# Altium PCB LED_PCB.PcbDoc (part 3 of 3)
Units mil, origin at the board's own origin, x right, y up, seen from the top; angles counter-clockwise.
Board outline 8000 x 4000 mil, 2 copper layers (Top Layer, Bottom Layer); 186 components, 303 nets, 1412 pads, 346 vias.
Unrouted connection lines stored in the file: 5.
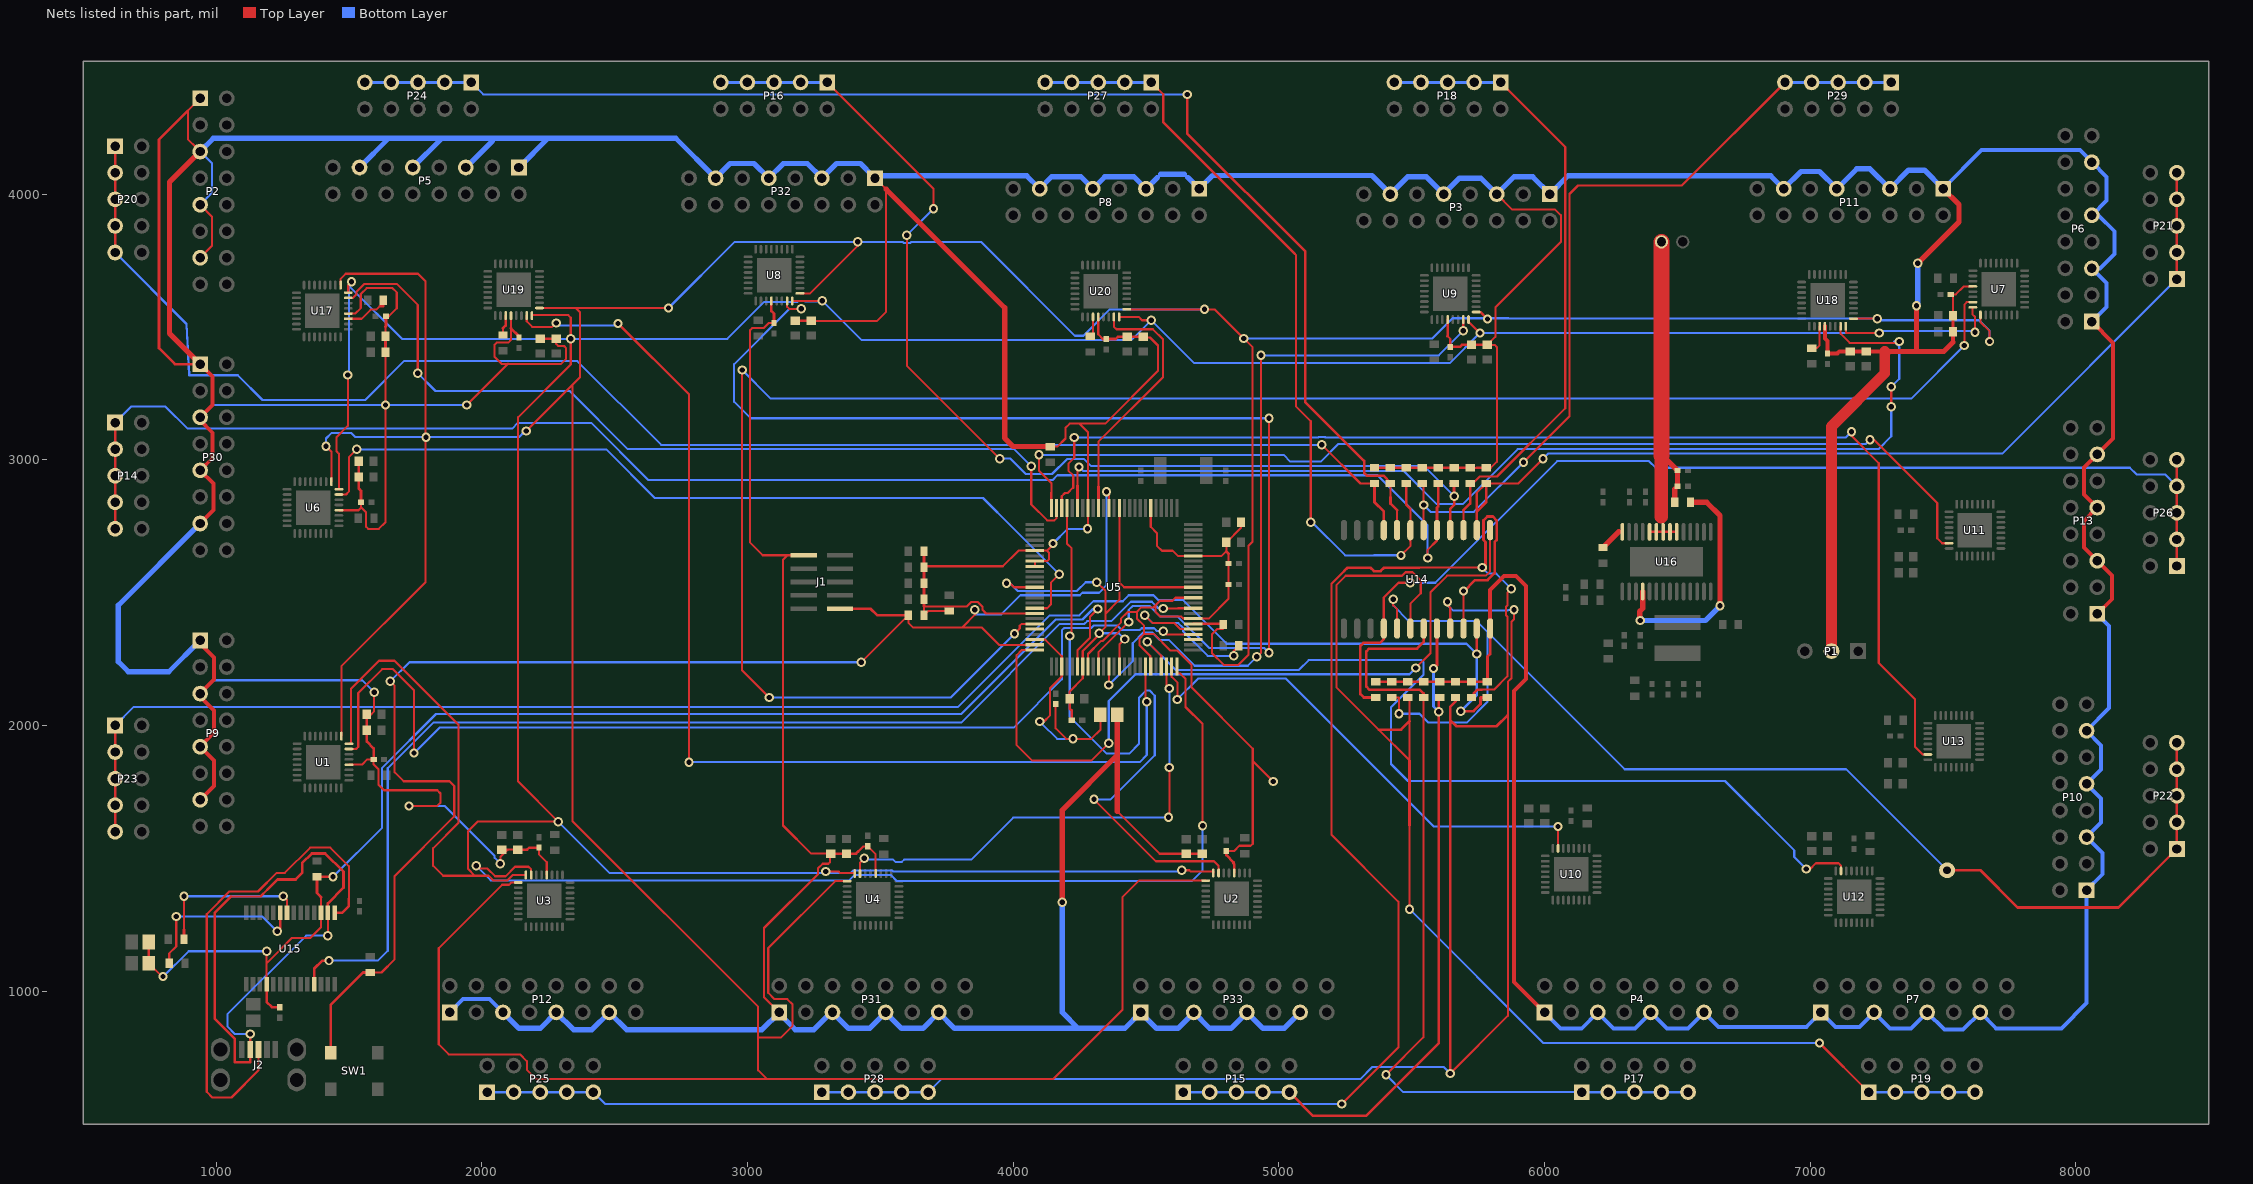
[diagram p3: the nets of this part, all layers, seen from the top]

## Via types
v1: diameter 35, hole 20, Top Layer to Bottom Layer, 334 vias
v2: diameter 25.98, hole 12.99, Top Layer to Bottom Layer, tented top, 12 vias

## Nets (pads, with @x,y where several pads share a name; then routed paths per layer and width w, separated by ;. In a path a pad name is that pad's centre, name@x,y a point inside that pad or via, vN(x,y) a via of type N, cw(c..) or ccw(c..) an arc to the next point about the centre after c; other vN are vias at no path point) (continued)
NetR38_1: R38.1 U15.23 | length 673.5
  Top Layer w8: R38.1@823.98,1105 823.98,1142 850,1168.02 850,1272 v1(850,1281) ; v1(1230,1225) 1241.61,1236.61 U15.23@1241.61,1294.45
  Top Layer w10: v1@841,1281 v1@850,1272
  Bottom Layer w8: v1(850,1281) 1174,1281 v1@1227.52,1227.48
NetR39_1: R39.1 U15.22 | length 639.4
  Top Layer w8: R39.1@879.53,1195 879.53,1230.53 v1(879.53,1357) ; v1(1253,1357) 1267.2,1342.8 U15.22@1267.2,1294.45
  Top Layer w10: R39.1@879.53,1195 879.53,1230.53
  Bottom Layer w8: v1(879.53,1357) v1(1253,1357)
NetR41_2: R41.2 U16.4 | length 932.5
  Top Layer w8: v1(6360,2395) 6355,2400 6360,2400 v1@6360,2405
  Top Layer w20: v1@6359.29,2409.29 6358,2410.57 6358,2428.8 6369.57,2440.36 U16.4@6369.57,2504.17 ; R41.2@6549.53,2840 6610,2840 6660,2790 v1(6660,2450)
  Bottom Layer w20: v1(6360,2395) 6355,2400 6360,2400 6360,2405 6370,2395 6605,2395 v1(6660,2450)
NetR42_1: R42.1 U16.28 | length 97.3
  Top Layer w8: 6279.05,2728.58 U16.28@6292.8,2728.58
  Top Layer w20: R42.1@6220,2669.53 6279.05,2728.58
NetR48_2: R48.2 U18.27 | length 106.3
  Top Layer w8: R48.2@7005,3420 7024,3420 7035.47,3431.47 U18.27@7035.47,3502.56
NetR49_2: R49.2 U17.27 | length 173.9
  Top Layer w8: U17.27@1497.44,3530.47 1547.94,3530.47 1582.47,3565 1603.43,3565 1616.28,3577.84 1629.53,3577.84 R49.2@1629.53,3600
NetR50_2: R50.2 U19.27 | length 129.1
  Top Layer w8: R50.2@2080,3469.53 2080,3495 2090.16,3505.16 2090.47,3505.47 U19.27@2090.47,3542.56
  Top Layer w10: 2080,3495 2090.16,3505.16 U19.27@2090.16,3542.56
NetR51_2: R51.2 U20.27 | length 77.4
  Top Layer w8: R51.2@4290,3464.53 4300.47,3475 U20.27@4300.47,3537.56
RESET: D3.1 J1.10 R9.1 SW1.1 U5.64 U5.99 | length 5752.2
  Top Layer w8: D3.1@1580,1070.47 1622.47,1070.47 1672,1120 1672,1433.5 1896.5,1658 1896.5,1772.14 1878.5,1790.14 1705.86,1790.14 1672,1824 1672,2150 v1(1656,2166) ; J1.10@3348.11,2439.21 3464,2439.21 ; v1(3428.47,2238) R9.1@3605.47,2415 3605.47,2386.56 3622.75,2369.28 3809.28,2369.28 ; v1(3855,2435) 3855,2421 3858,2418 3809.28,2369.28 ; U5.99@4081.77,2303.46 3946.54,2303.46 3880.72,2369.28 3809.28,2369.28 ; v1(4351,2880) 4360.32,2870.68 U5.64@4360.32,2818.23
  Top Layer w10: SW1.1@1431.42,768.9 1431.42,948.42 1553.47,1070.47 D3.1@1580,1070.47 ; 3464,2439.21 3488.21,2415 R9.1@3605.47,2415
  Bottom Layer w8: v1(1656,2166) 1728,2238 v1(3428.47,2238) ; v1(3855,2435) 3855,2421 3858,2418 3955.36,2418 4027.26,2489.91 4250.91,2489.91 4260.5,2499.5 4323.5,2499.5 4351,2527 v1(4351,2880)
SEL_LED_0: U1.31 U5.29 | length 4016.8
  Top Layer w8: U1.31@1500.2,1911.46 1526.46,1911.46 1535,1920 1535,2122 1625,2212 1666,2212 1745,2133 v1(1745,1896) ; v1(4565,2355) 4577.17,2342.83 U5.29@4678.23,2342.83
  Bottom Layer w8: v1(1745,1896) 1841,1992 4002,1992 4183.5,2173.5 4183.5,2358 4192,2366.5 4294.5,2366.5 4304.5,2376.5 4391.13,2376.5 4407.82,2359.81 4477.18,2359.81 4483.37,2366 4530.41,2366 4541.41,2355 v1(4565,2355)
SEL_LED_1: U3.31 U5.25 | length 3869.5
  Top Layer w8: v1(1979,1472) 1990,1461 2021.82,1461 2050.32,1432.5 2089.68,1432.5 2125.18,1468 2176,1468 2185.79,1458.21 U3.31@2185.79,1437.44 ; U5.25@4616.22,2221.77 4616.22,2195.03 4629.55,2195.03 4648.58,2176 4648.58,2069.64 4713,2005.22 v1(4713,1623)
  Bottom Layer w8: v1(1979,1472) 2034,1417 3382.92,1417 3403.67,1437.74 3538.85,1437.74 3562.59,1414 4672,1414 4713,1455 v1(4713,1623)
SEL_LED_2: U4.31 U5.23 | length 1856.6
  Top Layer w8: U4.31@3423.54,1442.44 3423.54,1483.54 v1(3440,1500) ; U5.23@4576.85,2221.77 4576.85,2150 v1(4588,2138.85) ; v1(4585,1655) 4575,1655 4588,1668 v1(4588,1842)
  Bottom Layer w8: v1@3440,1495 3548.31,1495 3556.78,1486.53 3581.22,1486.53 3589.69,1495 3842,1495 4000,1653 v1@4573,1653 ; v1(4588,1842) v1(4588,2138.85)
SEL_LED_3: U2.31 U5.72 | length 2503.3
  Top Layer w8: U5.72@4202.83,2818.23 4202.83,2684.17 4220,2667 4220,2344 v1(4213,2337) ; v1(4304,1722) 4537,1489 4756.03,1489 4773.03,1472 U2.31@4773.03,1444.68
  Bottom Layer w8: v1(4213,2337) 4213,2033 4352,1894 4437,1894 4473.5,1930.5 4473.5,2104.5 4501,2132 4513,2132 4533,2112 4533,1888 4367,1722 v1(4304,1722)
SEL_LED_4: U5.74 U17.31 | length 3338.6
  Top Layer w8: U17.31@1497.44,3609.21 1515.21,3609.21 1528.69,3622.69 1528.69,3632 1558.69,3662 1680,3662 1759,3583 v1(1759,3326) ; v1(4068,2976) 4068,2831.78 4128,2771.78 4155,2771.78 4163.46,2780.24 U5.74@4163.46,2818.23
  Bottom Layer w8: v1(1759,3326) 1826,3259 2330.74,3259 2549.74,3040 4004,3040 v1(4068,2976)
SEL_LED_5: U5.19 U19.31 | length 4218
  Top Layer w8: U19.31@2169.21,3542.56 2169.21,3520.79 2190,3500 2265,3500 v1(2280,3515) ; v1(2513,3513) 2780,3246 v1(2780,1862) ; U5.19@4498.11,2221.77 4498.11,2093.89 v1(4503,2089)
  Bottom Layer w8: v1(2280,3515) 2289.5,3505.5 2505.5,3505.5 v1(2513,3513) ; v1(2780,1862) 4476,1862 4503,1889 v1(4503,2089)
SEL_LED_6: U5.66 U20.31 | length 1057.9
  Top Layer w8: U5.66@4320.94,2818.23 4320.94,3067.94 4564.5,3311.5 4564.5,3452.5 4526,3491 4389.21,3491 4379.21,3501 U20.31@4379.21,3537.56
  Top Layer w10: U5.66@4320.94,2818.23 4320.94,2899.06
SEL_LED_7: U5.70 U18.31 | length 4123.5
  Top Layer w8: U5.70@4242.2,2818.23 4242.2,2967.2 v1(4248,2973) ; U18.31@7114.21,3502.56 7114.21,3474 7148.21,3440 v1@7335,3440 ; v1(7305,3200) v1(7305,3275)
  Top Layer w10: U5.70@4242.2,2818.23 4242.2,2902.8
  Bottom Layer w8: v1(4248,2973) 4263.5,2957.5 5469.5,2957.5 5594,2833 5692,2833 5899,3040 7257,3040 7305,3088 v1(7305,3200) ; v1(7305,3275) 7335,3305 7335,3425 7315,3445 v1(7335,3445)
SEL_LED_8: U5.92 U6.31 | length 3245.5
  Top Layer w8: U6.31@1462.44,2869.21 1484.21,2869.21 1489.21,2869.21 1500,2880 1500,2885 1500,3010 v1(1529,3039) ; U5.92@4081.77,2441.26 4128,2441.26 4142,2455.26 4142,2536.59 v1(4174,2568.59)
  Bottom Layer w8: v1(1529,3039) 2468,3039 2651,2856 3886.59,2856 3998.8,2743.8 v1(4174,2568.59)
SEL_LED_9: U5.10 U8.31 | length 4347.9
  Top Layer w8: U8.31@3149.21,3597.56 3149.21,3576 3157.21,3568 v1(3203,3568) ; U5.10@4320.94,2221.77 4320.94,2275.94 4414.31,2369.31 v1(4435,2389.31) ; v1(4963,2274) v1(4963,3156)
  Bottom Layer w8: v1(3203,3568) 3158,3568 2950,3360 2950,3218 3012,3156 v1(4963,3156) ; v1(4435,2389.31) 4435,2435 4449.5,2449.5 4513.78,2449.5 4553.78,2409.5 4620,2409.5 4738,2291.5 4945.5,2291.5 v1(4963,2274)
SEL_LED_10: U5.12 U9.31 | length 2797.2
  Top Layer w8: v1(4360.32,2152.32) U5.12@4360.32,2221.77 ; v1(4917,2258) 4933,2274 v1(4933,3393) ; v1(5694.21,3485) U9.31@5694.21,3527.56
  Bottom Layer w8: v1(4360.32,2152.32) 4450,2242 4450,2310 4490,2350 4523.78,2350 4552.78,2321 4587,2321 4683.5,2224.5 4883.5,2224.5 v1(4917,2258) ; v1(4933,3393) 5602.21,3393 v1(5694.21,3485)
SEL_LED_11: U5.95 U7.31 | length 7313.2
  Top Layer w8: v1(2980,3338) 2980,2207 v1(3082,2105) ; v1(4005,2345) 4025,2365 4025,2375 4032.2,2382.2 U5.95@4081.77,2382.2 ; v1(7580,3430) 7580,3584 7589.23,3593.23 U7.31@7612.09,3593.23
  Bottom Layer w8: v1(2980,3338) 3088,3230 7380,3230 v1(7580,3430) ; v1(3082,2105) 3765,2105 v1(4005,2345)
SEL_LED_12: U5.24 U10.31 | length 1911
  Top Layer w8: U5.24@4596.54,2221.77 4596.54,2183.46 4618,2162 v1(4618,2098) ; U10.31@6050.79,1537.44 v1(6050.79,1620)
  Bottom Layer w8: v1(4618,2098) 4696.5,2176.5 5025.5,2176.5 5582,1620 v1(6050.79,1620)
SEL_LED_13: U5.22 U12.31 | length 3540.3
  Top Layer w8: v1(4505,2315) 4557.17,2262.83 U5.22@4557.17,2221.77 ; v1@7000,1460 7021.17,1481.17 7106.62,1481.17 7115.79,1472 U12.31@7115.79,1452.44
  Bottom Layer w8: v1(4505,2315) 4611.5,2208.5 5074.5,2208.5 5112,2246 5536,2246 5545,2237 5545,2192 5422,2069 5422,1855 5486,1791 6679,1791 6940,1530 6940,1505 v1(6985,1460)
SEL_LED_14: U5.73 U13.31 | length 4581.5
  Top Layer w8: U5.73@4183.15,2818.23 4183.15,2863.15 4195,2875 4205,2875 4224,2894 4225.2,2894 ; 4226,2894 4226,2941 4208,2959 4208,2985 4230,3007 v1(4230,3084) ; v1@7147.5,3097.5 7258,2987 7258,2235 7394,2099 7394,1920 7423.21,1890.79 U13.31@7442.56,1890.79
  Bottom Layer w8: v1(4230,3084) 5148.28,3084 5149.78,3085.5 5174.22,3085.5 5175.72,3084 7134,3084 v1(7155,3105)
SEL_LED_15: U5.75 U11.31 | length 3986.1
  Top Layer w8: v1(4097.5,3018.5) 4097.5,2958.5 4143.78,2912.22 U5.75@4143.78,2818.23 ; v1(7225,3075) 7240,3075 7478,2837 7478,2704 7496.21,2685.79 U11.31@7522.56,2685.79
  Top Layer w10: U5.75@4143.78,2818.23 4143.78,2876.22
  Bottom Layer w8: v1(4097.5,3018.5) 5017.85,3018.5 5043.26,2993.08 5158.08,2993.08 5224,3059 7209,3059 v1(7225,3075)
SEL_LED_MODE: U5.96
SPI_CLK: U1.32 U2.32 U3.32 U4.32 U6.32 U7.32 U8.32 U9.32 U17.32 U18.32 U19.32 U20.32 | length 14995.8
  Top Layer w8: U6.32@1462.44,2888.9 1462.44,3022.56 1453.5,3031.5 1453.5,3085.19 1496,3127.69 v1(1496,3319) ; 1497.44,3657.44 U17.32@1497.44,3628.9 U17.32@1500,3628.9 ; U1.32@1500.2,1931.14 1508,1931.14 1508,2138 1613.5,2243.5 1671.5,2243.5 1912.5,2002.5 1912.5,1633.5 1817,1538 1817,1472 1854.5,1434.5 1973.98,1434.5 ; 2114.3,1434.5 2096.3,1416.5 ; U3.32@2166.1,1437.44 2117.24,1437.44 2096.3,1416.5 ; U19.32@2188.9,3547 U19.32@2188.9,3542.56 2190.84,3544.5 2325.5,3544.5 2335,3535 v1(2335,3455) 2335,3358.28 2137,3160.28 2137,1789 v1(2288,1638) 1984,1638 1948.54,1602.54 1948.54,1459.94 1973.98,1434.5 ; U8.32@3168.9,3597.56 3168.9,3598 v1(3282,3598) ; v1(3295,1450) 3344,1450 3350,1444 3403.86,1444 U4.32@3403.86,1442.44 ; U20.32@4398.9,3537.56 4472.44,3537.56 4485,3525 v1(4520,3525) ; v1(4635,1455) 4663,1455 4667,1451 4753.35,1451 U2.32@4753.35,1444.68 ; U9.32@5713.9,3527.56 5713.9,3519.83 v1(5756.72,3477) ; U18.32@7133.9,3502.56 7133.9,3477 v1(7260,3477) ; U7.32@7612.09,3573.54 7610,3573.54 7610,3548 7620,3538 v1(7620,3480) ; 1973.98,1434.5 2025.7,1434.5 2043.7,1416.5 2096.3,1416.5
  Bottom Layer w8: v1@1500,3323 1500,3655 1700,3455 v1(2335,3455) 2924,3455 3063,3594 3187.28,3594 3190.78,3597.5 3215.22,3597.5 3217.67,3595.05 3279.05,3595.05 v1(3282,3598) 3430,3450 4445,3450 v1(4520,3525) 4681.5,3363.5 5643.22,3363.5 v1(5756.72,3477) v1(7260,3477) 7268,3485 7567,3485 7615,3485 v1(7620,3480) ; v1(2288,1638) 2482,1444 3387.29,1444 3397.04,1453.74 3545.47,1453.74 3548.22,1451 v1@4635,1451 ; v1(4635,1455) v1@4639,1451
  other v1: 1510,3670
SPI_MISO: R10.2 U5.30 | length 656.7
  Top Layer w8: v1(4495,2415) 4525,2385 4607.52,2385 4630,2362.52 U5.30@4678.23,2362.52 ; v1(4830,2262) 4830,2280.47 R10.2@4849.53,2300
  Bottom Layer w8: v1(4495,2415) 4525,2385 4621.72,2385 4639.5,2367.22 4639.5,2354.81 4732.31,2262 v1(4830,2262)
SPI_MOSI: R11.2 U1.1 U2.1 U3.1 U4.1 U5.31 U6.1 U7.1 U8.1 U9.1 U17.1 U18.1 U19.1 U20.1 | length 20190.7
  Top Layer w8: v1(1414,3051) 1433.9,3031.1 U6.1@1433.9,2917.44 ; U17.1@1468.9,3657.44 1468.9,3680.9 1488,3700 1760,3700 1789,3671 1789,2540 1471.65,2222.65 U1.1@1471.65,1959.68 ; U3.1@2137.56,1408.9 2111.33,1408.9 2102.93,1400.5 2076.6,1400.5 1838,1161.9 1838,800 1876,762 2144,762 2170,736 2170,704 2204,670 3072,670 ; v1(2167,3108) 2341.72,3282.72 ; U19.1@2217.44,3571.1 v1@2702.9,3571.1 ; 2354.45,3570.55 2370,3555 2370,3311 2341.72,3282.72 ; U8.1@3197.44,3626.1 3236.1,3626.1 3415,3805 v1(3415,3820) ; U4.1@3375.32,1413.9 3330,1413.9 3078.47,1162.37 3078.47,993.53 3102,970 3150,970 3170,950 3170,870 3125,825 3040,825 ; U20.1@4427.44,3566.1 v1(4719.9,3566.1) 4757.9,3566.1 v1(4867.5,3456.5) ; U2.1@4724.8,1416.14 4473.14,1416.14 4411,1354 4411,929 4152,670 3072,670 ; R11.2@4790.47,2380 4790.47,2363.15 4768,2363.15 4748.3,2343.45 4748.3,2272 4792.3,2228 4848,2228 4886,2266 4886,2676.79 4901.31,2692.1 4901.31,3423.69 v1@4868,3457 ; U9.1@5742.44,3556.1 5758.9,3556.1 v1(5785,3530) ; U18.1@7162.44,3531.1 v1(7252.1,3531.1) ; U7.1@7640.63,3545 7640.63,3517.37 7675,3483 v1(7675,3445) ; 2341.72,3282.72 2341.72,1639.28 3040,941 3040,825 ; 3040,825 3040,702 3072,670
  Top Layer w10: U5.31@4678.23,2382.2 4788.27,2382.2 R11.2@4790.47,2380
  Bottom Layer w8: v1(1414,3051) 1413.91,3051.09 1413.91,3080 1433.91,3100 1510,3100 1525,3085 v1(1790,3085) 2140,3085 2163,3108 v1(2167,3108) ; v1(2703,3571) 2952,3820 v1(3415,3820) 3583.28,3820 3587.78,3815.5 3612.22,3815.5 3616.72,3820 3879,3820 4232.5,3466.5 4264.5,3466.5 4364.1,3566.1 v1(4719.9,3566.1) ; v1(4867.5,3456.5) 5577.5,3456.5 5653.44,3532.44 5864.56,3532.44 v1(7252.1,3531.1) 7258.2,3525 7635,3525 7675,3485 v1(7675,3445)
SPI_SCK: U5.28
TILE_0: P20.1 P20.2 P20.3 P20.4 P20.5 R27.1 U14.9 | length 6036.7
  Top Layer w8: v1(5162,3056) 5307.53,2910.47 R27.1@5360,2910.47 ; U14.9@5395,2735.04 5395,2784
  Top Layer w10: P20.5@620,3780 P20.4@620,3880 P20.3@620,3980 P20.2@620,4080 P20.1@620,4180 ; v1@5161.47,3056 v1@5161.74,3055.74 ; R27.1@5360,2910.47 5360,2840 5395,2805 5395,2784 U14.9@5395,2735.04
  Bottom Layer w8: P20.5@620,3780 889,3511 899,3318 1082,3318 1175,3225 1561,3225 1707,3371 2360,3371 2675,3056 5089,3056 ; 5089,3056 v1(5162,3056) 5089,3056
TILE_1: P24.1 P24.2 P24.3 P24.4 P24.5 R30.1 U14.8 | length 5120.7
  Top Layer w8: 5420,2860 R30.1@5420,2910.47 ; U14.8@5445,2735.04 5445,2810
  Top Layer w10: v1(4655,4375) 4655,4228.28 5100,3783.28 5100,3216 5321,2995 5321,2950 5331,2940 5393,2940 5422.53,2910.47 R30.1@5420,2910.47 ; 5420,2860 5420,2835 5445,2810
  Bottom Layer w8: P24.1@1960,4420 2005,4375 v1(4655,4375)
  Bottom Layer w10: P24.5@1560,4420 P24.4@1660,4420 P24.3@1760,4420 P24.2@1860,4420 P24.1@1960,4420
TILE_2: P27.1 P27.2 P27.3 P27.4 P27.5 R35.1 U14.7 | length 3029.9
  Top Layer w8: P27.1@4520,4420 4565,4375 ; 5060,3775 5065,3770 5065,3200 5120,3145 v1(5120,2765) ; v1(5460,2640) 5495,2675 U14.7@5495,2735.04 5495,2815 ; R35.1@5476,2910.47 R35.1@5480,2910.47
  Top Layer w10: 4565,4375 4565,4270 5060,3775 ; R35.1@5480,2910.47 5480,2830 5495,2815 ; 5495,2696 U14.7@5495,2735.04
  Bottom Layer w8: v1(5120,2765) 5125,2765 5250,2640 5357.28,2640 5357.78,2640.5 5459.5,2640.5 v1(5460,2640)
  Bottom Layer w10: P27.5@4120,4420 P27.4@4220,4420 P27.3@4320,4420 P27.2@4420,4420 P27.1@4520,4420
TILE_3: P29.1 P29.2 P29.3 P29.4 P29.5 R37.1 U14.6 | length 3117.4
  Top Layer w8: R37.1@5540,2910.47 5545,2905.47 v1(5545,2830) U14.6@5545,2735.04 ; v1(5921,2991) 6094,3164 6094,4000 6126,4032 6517,4032 P29.5@6905,4420
  Top Layer w10: v1@5545,2820 v1(5545,2830)
  Bottom Layer w8: v1(5545,2830) 5571,2804 5734,2804 v1(5921,2991)
  Bottom Layer w10: P29.5@6905,4420 P29.4@7005,4420 P29.3@7105,4420 P29.2@7205,4420 P29.1@7305,4420
TILE_4: P14.1 P14.2 P14.3 P14.4 P14.5 R21.1 U14.5 | length 6002.2
  Top Layer w8: v1(5560,2630) 5560,2661 5595,2696 U14.5@5595,2735.04
  Top Layer w10: P14.5@620,2740 P14.4@620,2840 P14.3@620,2940 P14.2@620,3040 P14.1@620,3140 ; U14.5@5595,2735.04 5595,2820 5600,2825 R21.1@5600,2910.47
  Bottom Layer w8: P14.1@620,3140 680,3200 810,3200 892.91,3117.09 2114.49,3117.09 2136.04,3138.64 2411.66,3138.64 2626.3,2924 4148.79,2924 4166.29,2941.5 5371.13,2941.5 5560,2752.63 v1(5560,2630)
TILE_5: P16.1 P16.2 P16.3 P16.4 P16.5 R23.1 U14.4 | length 4236.2
  Top Layer w8: P16.1@3300,4410 P16.1@3300,4420 3700,4020 v1(3700,3945) ; v1(3600,3845) 3600,3354 v1(3950,3004) ; U14.4@5645,2735.04 5645,2815 ; R23.1@5645,2910.47 5659,2910.47 R23.1@5660,2910.47 v1(5660,2863)
  Top Layer w10: 5645,2815 5660,2830 v1(5660,2863) ; v1@5659,2864 R23.1@5659,2910.47
  Bottom Layer w8: v1(3600,3845) v1(3700,3945) ; v1(3950,3004) 3990.26,3004 4048,2946.26 4146.26,2946.26 4202.5,3002.5 4267,3002.5 4292.42,2977.08 5545.92,2977.08 v1(5660,2863)
  Bottom Layer w10: P16.5@2900,4420 P16.4@3000,4420 P16.3@3100,4420 P16.2@3200,4420 P16.1@3300,4420
TILE_6: P18.1 P18.2 P18.3 P18.4 P18.5 R25.1 U14.3 | length 2382.3
  Top Layer w8: U14.3@5695,2735.04 5695,2810 ; R25.1@5720,2901 5756,2937 5821,2937 6078,3194 6078,4177 P18.1@5835,4420
  Top Layer w10: 5695,2810 5720,2835 R25.1@5720,2901
  Bottom Layer w10: P18.5@5435,4420 P18.4@5535,4420 P18.3@5635,4420 P18.2@5735,4420 P18.1@5835,4420
TILE_7: P21.1 P21.2 P21.3 P21.4 P21.5 R28.1 U14.2 | length 3698.6
  Top Layer w8: U14.2@5745,2735.04 5745,2805 5745,2875.47 R28.1@5780,2910.47 5900.47,2910.47 v1(5994,3004)
  Top Layer w10: U14.2@5745,2735.04 5745,2805 5780,2840 R28.1@5780,2910.47 ; P21.1@8380,3680 P21.2@8380,3780 P21.3@8380,3880 P21.4@8380,3980 P21.5@8380,4080
  Bottom Layer w8: v1(5994,3004) 6013,3023 7723,3023 P21.1@8380,3680
TILE_8: P23.1 P23.2 P23.3 P23.4 P23.5 R31.1 U14.23 | length 6291.6
  Top Layer w8: 5745,2298 U14.23@5745,2364.96
  Top Layer w10: P23.5@620,1600 P23.4@620,1700 P23.3@620,1800 P23.2@620,1900 P23.1@620,2000 ; v1(5685,2054) 5733,2054 5759,2080 5759,2105.47 R31.1@5785,2105.47 ; v1(5745,2269) 5745,2298
  Bottom Layer w8: P23.1@620,2000 690,2070 3792.87,2070 4137.37,2414.5 4249.09,2414.5 4302.09,2467.5 4412.5,2467.5 4435,2490 4528.28,2490 4546.78,2471.5 4640,2471.5 4804,2307.5 5706.5,2307.5 v1(5745,2269)
  Bottom Layer w10: v1(5685,2054) 5745,2114 v1(5745,2269)
TILE_9: P25.1 P25.2 P25.3 P25.4 P25.5 R32.1 U14.22 | length 7400.8
  Top Layer w8: v1(5237,575) 5450,788 5450,1337 5198,1589 5198,2533.6 5245.71,2581.31 ; 5528.96,2593.5 5529.96,2594.5 v1(5765.5,2594.5) ; U14.22@5695,2364.96 5695,2503 v1(5695,2506) ; R32.1@5725,2105.47 R32.1@5733,2105.47 ; 5762.53,2135 5810,2135 5860,2185 5860,2410 5855.5,2414.5 5855.5,2447.22 5860,2451.72 5860,2500 v1(5875,2515)
  Top Layer w10: 5245.71,2581.31 5257.4,2593 5322.04,2593 5322.54,2593.5 5344.37,2593.5 5357.37,2580.5 5382.63,2580.5 5395.63,2593.5 5528.96,2593.5 ; v1@5695,2503 5739,2547 5786.04,2547 5812,2572.96 5812,2690.38 5819.81,2698.19 5819.81,2771.89 5805.28,2786.43 5784.72,2786.43 5770.19,2771.89 5770.19,2698.19 5778,2690.38 v1@5778,2587.04 ; R32.1@5733,2105.47 5733,2120 5748,2135 5762.53,2135
  Bottom Layer w8: P25.5@2420,620 2465,575 v1(5237,575) ; v1(5695,2506) v1@5704,2515 ; v1(5765.5,2594.5) 5788.5,2571.5 5818.5,2571.5 v1(5875,2515)
  Bottom Layer w10: P25.1@2020,620 P25.2@2120,620 P25.3@2220,620 P25.4@2320,620 P25.5@2420,620
TILE_10: P28.1 P28.2 P28.3 P28.4 P28.5 R36.1 U14.21 | length 6301.2
  Top Layer w8: v1(5635,2465) 5635,2453 5645,2443 U14.21@5645,2364.96 ; v1(5645,690) 5862,907 5862,2040 5862,2164.37 5876,2178.37 5876,2391 5885,2400 v1@5885,2434
  Top Layer w10: v1(5645,690) 5645,2020 ; R36.1@5665,2105.47 5665,2090 5645,2070 5645,2020 ; 5862,2040 5819,1997 5668,1997 5645,2020
  Bottom Layer w8: P28.5@3680,620 3729,669 5306.54,669 5352.17,714.63 5620.37,714.63 v1(5645,690) ; v1(5635,2465) 5635,2453 5655,2433 5862,2433 5864,2435 v1(5885,2435)
  Bottom Layer w10: P28.1@3280,620 P28.2@3380,620 P28.3@3480,620 P28.4@3580,620 P28.5@3680,620
TILE_11: P15.1 P15.2 P15.3 P15.4 P15.5 R22.1 U14.20 | length 2742.7
  Top Layer w10: P15.5@5040,620 5129,531 5328.35,531 5602,804.65 v1(5602,2052) 5602,2105.47 R22.1@5605,2105.47 ; v1(5582,2214) 5595,2227 U14.20@5595,2364.96
  Bottom Layer w10: P15.1@4640,620 P15.2@4740,620 P15.3@4840,620 P15.4@4940,620 P15.5@5040,620 ; v1(5582,2214) 5582,2072 v1(5602,2052)
TILE_12: P17.1 P17.2 P17.3 P17.4 P17.5 R24.1 U14.19 | length 3299.6
  Top Layer w8: v1(5403,685) 5544,826 5544,2105.47 R24.1@5545,2105.47
  Top Layer w10: R24.1@5545,2105.47 5545,2120 5530,2135 5340,2135 5329,2146 5329,2279 5339,2289 5520,2289 5545,2314 U14.19@5545,2364.96
  Bottom Layer w8: v1(5403,685) 5468,620 P17.1@6140,620
  Bottom Layer w10: P17.1@6140,620 P17.2@6240,620 P17.3@6340,620 P17.4@6440,620 P17.5@6540,620
TILE_13: P19.1 P19.2 P19.3 P19.4 P19.5 R26.1 U14.18 | length 4911.3
  Top Layer w8: R26.1@5485,2105.47 5492,2105.47 5492,2016 5492,1868 ; v1(5492,1308) 5492,1868 ; U14.18@5495,2364.96 5495,2458 5534,2497 5534,2546 5503.5,2576.5 5476.5,2576.5 5463.5,2563.5 5251.94,2563.5 5216.44,2528 5216.44,2143.56 5376,1984 5492,1868 ; v1(7035,805) P19.1@7220,620
  Top Layer w10: 5376,1984 5460,1984 5492,2016 ; 5492,1625 5492,1868
  Bottom Layer w8: v1(5492,1308) 5995,805 v1(7035,805)
  Bottom Layer w10: P19.1@7220,620 P19.2@7320,620 P19.3@7420,620 P19.4@7520,620 P19.5@7620,620
TILE_14: P22.1 P22.2 P22.3 P22.4 P22.5 pad.0 R29.1 U14.17 | length 5161.9
  Top Layer w8: R29.1@5425,2105.47 5452,2105.47 v1(5452,2044) ; v1(5430,2475) 5430,2452 5445,2437 U14.17@5445,2364.96 ; 7780,1315 8160,1315 P22.1@8380,1535
  Top Layer w10: pad.0@7515,1455 7640,1455 7780,1315 8160,1315 ; P22.1@8380,1535 P22.2@8380,1635 P22.3@8380,1735 P22.4@8380,1835 P22.5@8380,1935
  Bottom Layer w8: v1(5430,2475) 5430,2452 5489.4,2392.6 5744.4,2392.6 5785,2352 ; v1(5452,2044) 5529.08,2044 5561.56,2011.52 5708.48,2011.52 5785,2088.04 5785,2352 ; pad.0@7515,1455 7135,1835 6302,1835 5785,2352
TILE_15: P26.1 P26.2 P26.3 P26.4 P26.5 R33.1 U14.16 | length 4150.7
  Top Layer w8: U14.16@5395,2364.96 5395,2481.72 5450.28,2537 v1(5494,2537) v1@5479.7,2537
  Top Layer w10: R33.1@5365,2105.47 5320,2105.47 5307,2118.47 5307,2300 5318,2311 5380,2311 5395,2326 U14.16@5395,2364.96 ; P26.1@8380,2600 P26.2@8380,2700 P26.3@8380,2800 P26.4@8380,2900 P26.5@8380,3000
  Bottom Layer w8: v1(5494,2537) 5589.23,2537 6047.23,2995 6393,2995 6418,2970 8203,2970 8228,2945 8335,2945 P26.4@8380,2900
TILE_SENSE: U5.100 U14.1 | length 2898.3
  Top Layer w8: U5.100@4081.77,2283.78 4032,2283.78 4013,2264.78 4013,1926 4070.5,1868.5 4295.5,1868.5 v1(4360,1933) ; v1(5515.5,2216.5) 5571,2272 5571,2501 5634,2564 5779,2564 5795,2580 U14.1@5795,2735.04
  Bottom Layer w8: v1(4360,1933) 4360,2092.12 4460.38,2192.5 5491.5,2192.5 v1(5515.5,2216.5)
USB_CTS: U5.34 U15.11 | length 4349.8
  Top Layer w8: U15.11@1369.57,1025.55 1369.57,1059.57 ; v1(4565,2440) 4617,2440 ; 4619.74,2441.26 U5.34@4678.23,2441.26
  Top Layer w10: 1369.57,1059.57 1369.57,1084.57 1400,1115 v1(1425,1115)
  Bottom Layer w8: v1(1425,1115) 1609,1115 1646,1152 1646,1838.72 1817.89,2010.61 3804.11,2010.61 4176,2382.5 4268.5,2382.5 4278.5,2392.5 4369.87,2392.5 4442.87,2465.5 4521.63,2465.5 4545.13,2442 4563,2442 v1(4565,2440)
USBDM: J2.2 U15.16 | length 2293.7
  Top Layer w8: 1056.42,1356.42 1167.56,1356.42 1193,1381.85 ; J2.2@1128.5,780 v1(1128.5,839) ; v1(1420.75,1209) U15.16@1420.75,1294.45
  Top Layer w10: 1056.42,1356.42 995,1295 995,896.46 1071,820.46 1071,732.52 1128.5,732.52 J2.2@1128.5,780 ; 1193,1381.85 1231.65,1420.5 1299.47,1420.5 1323.98,1445.01 1323.98,1481.79 1360.5,1518.31 1410.66,1518.31 1479.53,1449.44 1479.53,1389.53 1420.75,1330.75 U15.16@1420.75,1294.45
  Bottom Layer w8: v1(1128.5,839) 1071,839 1042.5,867.5 1042.5,912.5 1339,1209 v1(1420.75,1209)
USBDP: J2.3 U15.15 | length 1874.7
  Top Layer w8: J2.3@1160,780 1160,702 1058,600 986,600 965,621 965,1290 1050,1375 1157.86,1375 1227.86,1445 1258.9,1445 1353.9,1540 1430,1540 1500,1470 1500,1348.11
  Top Layer w10: U15.15@1446.34,1294.45 1474.45,1294.45 1500,1320 1500,1348.11
V_USB: C47.2 D1.1 D2.1 R40.1 U5.6 U15.4 U15.17 | length 5025.8
  Top Layer w8: D1.1@746.5,1105 791.5,1060 795,1060 v1(800,1055) ; U15.4@1190.43,1025.55 1190.43,1105.53 ; v1(1190.43,1150) 1190.43,1105.53 ; R40.1@1380,1430.47 1439.53,1430.47 v1(1440,1430) ; 1395.16,1354 U15.17@1395.16,1294.45 1395.16,1240 1355.16,1200 1284.9,1200 1190.43,1105.53 ; U5.6@4242.2,2221.77 4242.2,2283.2 4289.9,2330.9 4289.9,2409.9 v1(4318,2438)
  Top Layer w10: D1.1@746.5,1105 D2.1@746.5,1185 ; U15.4@1190.43,1025.55 1190.43,960 1210.75,939.69 C47.2@1240,939.69 ; v1(1190.43,1150) v1@1190.43,1150.43 ; R40.1@1380,1430.47 1380,1369.16 1395.16,1354
  Bottom Layer w8: v1@800,1053 897,1150 v1(1190.43,1150) ; v1(1440,1430) 1625,1615 1625,1840.35 1827.65,2043 3804.5,2043 4160,2398.5 4261,2398.5 4300.5,2438 v1(4318,2438)
VBAT: C48.1 C49.1 J3.1 R41.1 U16.20 U16.21 U16.22 U16.23 U16.24 | length 1431
  Top Layer w8: 6439.74,2785.26 6446.34,2778.66 U16.22@6446.34,2728.58 ; 6440,3014.74 6439.74,3015 6450,3015 ; 6450,3010.32 6450,3015 ; 6455,3015 6450,3015 ; 6490.47,2890.16 C48.1@6500.32,2900
  Top Layer w10: U16.24@6395.16,2728.58 U16.23@6420.75,2728.58 U16.22@6446.34,2728.58 U16.21@6471.93,2728.58 U16.20@6497.52,2728.58
  Top Layer w20: 6450,3010.32 C49.1@6500.32,2960 C48.1@6500.32,2900 ; R41.1@6490.47,2840 6490.47,2890.16
  Top Layer w50: 6439.74,2785.26 6439.74,3015
  Top Layer w60: 6439.74,3015 J3.1@6439.74,3818.89
  Bottom Layer w8: J3.1@6440,3820 J3.1@6440,3840
VCC: C1.2 C2.2 C3.2 C4.2 C5.2 C6.2 C7.2 C8.2 C9.2 C10.2 C11.2 C12.2 C13.2 C14.2 C15.2 C16.2 C22.2 C23.2 C24.2 C25.2 C26.2 C27.2 C28.2 C29.2 C30.2 C31.2 C32.2 C33.2 C60.2 C61.2 C62.2 C63.2 C64.2 C65.2 C66.2 C67.2 C68.2 C69.2 C70.2 C71.2 J1.1 L1.2 P1.2 P2.1 P2.5 P2.9 P2.13 P3.1 P3.5 P3.9 P3.13 P4.1 P4.5 P4.9 P4.13 P5.1 P5.5 P5.9 P5.13 P6.1 P6.5 P6.9 P6.13 P7.1 P7.5 P7.9 P7.13 P8.1 P8.5 P8.9 P8.13 P9.1 P9.5 P9.9 P9.13 P10.1 P10.5 P10.9 P10.13 P11.1 P11.5 P11.9 P11.13 P12.1 P12.5 P12.9 P12.13 P13.1 P13.5 P13.9 P13.13 P30.1 P30.5 P30.9 P30.13 P31.1 P31.5 P31.9 P31.13 P32.1 P32.5 P32.9 P32.13 P33.1 P33.5 P33.9 P33.13 R5.2 R6.2 R7.2 R8.2 R9.2 R12.2 R21.2 R22.2 R23.2 R24.2 R25.2 R26.2 R27.2 R28.2 R29.2 R30.2 R31.2 R32.2 R33.2 R34.1 R35.2 R36.2 R37.2 U1.28 U2.28 U3.28 U4.28 U5.8 U5.20 U5.32 U5.36 U5.44 U5.56 U5.68 U5.81 U5.83 U5.84 U5.93 U6.28 U7.28 U8.28 U9.28 U14.24 U17.28 U18.28 U19.28 U20.28 | length 51006.1
  Top Layer w8: P30.5@940,3160 986,3206 ; P2.13@940,3760 984.27,3804.27 984.27,3915.73 P2.9@940,3960 ; P2.5@940,4160 925,4175 894,4206 894,4314 P2.1@940,4360 ; U6.28@1462.44,2810.16 1536,2810.16 1545.31,2819.47 1545.31,2821 ; U17.28@1497.44,3550.16 1524.16,3550.16 1544.69,3570.69 1544.69,3624 1566.69,3646 1664,3646 1680,3630 1680,3570.37 1649.63,3540 1639.69,3530.06 1637.56,3527.93 1637.56,3501 C61.2@1637.56,3465 ; U1.28@1500.2,1852.4 1549.16,1852.4 1569,1872.24 C4.2@1593.07,1872.24 1593.07,1853 1612,1834.07 1612,1776 1631.86,1756.14 1832.36,1756.14 1844.5,1744 1844.5,1709.64 1832,1697.14 v1(1726,1697.14) ; C25.2@1545.31,2840 1545.31,2821 ; C3.2@1567.64,2042.24 1584,2042.24 1595,2053.24 v1(1595,2125) ; C62.2@1637.56,3405 v1@1637.56,3206.44 ; v1(1638,3206) v1@1637.56,3206.44 ; v1(1943,3206) 2097,3360 ; v1(2070,1480) 2070,1505 2097.44,1532.44 C5.2@2135,1532.44 ; 2098.5,3361.5 2097,3360 ; U19.28@2110.16,3542.56 2110.16,3494.64 2110.16,3451.22 2099.94,3441 2056,3441 2048,3433 2048,3388.25 2076.25,3360 2097,3360 ; C7.2@2215,1540.31 2215,1515 2244.84,1485.16 U3.28@2244.84,1437.44 ; C64.2@2280,3455.12 2280,3436 2288,3428 2309.72,3428 2317.72,3420 2317.72,3380.25 2297.47,3360 2097,3360 ; C28.2@3100,3514.69 3079.69,3514.69 3061,3496 3018,3496 3010,3488 3010,2688 3057.21,2640.79 3150.79,2640.79 ; P31.1@3120,920 3062.47,977.53 3062.47,1237.47 3265.5,1440.5 3265.5,1462.22 3282.78,1479.5 3304.5,1479.5 3310,1485 C11.2@3310,1517.44 ; J1.1@3211.89,2640.79 3150.79,2640.79 ; C27.2@3240,3522.56 3488,3522.56 3522,3556.56 3522,4018 P32.1@3480,4060 ; C11.2@3312.76,1517.44 3240,1517.44 3134,1623.44 3134,2624 3150.79,2640.79 ; 3416.63,1525.31 3435,1543.68 3435,1545 C12.2@3452.76,1545 3482.6,1515.16 U4.28@3482.6,1442.44 ; R8.2@3664.53,2471 R8.2@3664.53,2475 ; R6.2@3664.53,2595 3664.53,2599 3961.33,2599 4020.13,2657.8 U5.81@4081.77,2657.8 4127.2,2657.8 ; R34.1@3760,2430.47 3680,2430.47 R9.2@3664.53,2415 3664.53,2447.5 3825.78,2447.5 3842.78,2464.5 3867.22,2464.5 3884.5,2447.22 3884.5,2435 3897.93,2421.57 U5.93@4081.77,2421.57 ; U5.84@4081.77,2598.74 U5.83@4081.77,2618.43 4128.43,2618.43 4135,2625 4135,2650 4127.2,2657.8 ; R12.2@4140,3049.53 4166.53,3049.53 4197,3080 4197,3120 4213,3136 4249.57,3136 ; v1(4150,2685) 4150,2680.59 4127.2,2657.8 ; v1@4275,2740 v1(4280,2740) 4281.57,2741.57 U5.68@4281.57,2818.23 4281.57,3104 4249.57,3136 ; U5.8@4281.57,2221.77 4281.57,2269 4330,2317.43 4336.15,2317.43 4405.5,2386.78 4405.5,2401.53 4431.19,2427.22 4465.5,2427.22 ; U20.28@4320.16,3537.56 4320.16,3472 4337.47,3454.69 4337.69,3454.69 C71.2@4350,3454.69 ; 4391.5,1677 4551.25,1517.24 C9.2@4652.24,1517.24 ; C70.2@4490,3462.56 4492.56,3460 4515,3460 4545,3430 4545,3335 4346,3136 4249.57,3136 ; U5.20@4517.8,2221.77 4516.02,2223.55 4516.02,2261.19 4475.5,2301.71 4475.5,2327.22 4492.78,2344.5 ; U5.56@4517.8,2818.23 4517.8,2747.5 4540.8,2724.5 4540.8,2676.7 4560,2657.5 4600.38,2657.5 4619.77,2638.11 U5.44@4678.23,2638.11 4784.55,2638.11 4802.44,2656 ; U5.36@4678.23,2480.63 4610.63,2480.63 4599.5,2469.5 4552.78,2469.5 4535.5,2452.22 ; C1.2@4802.24,1527.56 4832,1527.56 4851.44,1547 4894,1547 4901.96,1554.96 4901.96,1866.04 ; U2.28@4832.09,1444.68 4832.09,1477.91 ; C15.2@4857.56,2765 4857.56,2744 4803.56,2690 C16.2@4802.44,2690 4802.44,2656 ; v1(4979,1789) 4901.96,1866.04 ; U9.28@5635.16,3527.56 5635.16,3464.84 5645,3455 C33.2@5645,3424.69 ; R25.2@5720,2969.53 5746,2969.53 ; R28.2@5780,2969.53 5798.03,2969.53 5820.5,2992 5820.5,3424.5 5812.44,3432.56 C31.2@5785,3432.56 5815,3462.56 5815,3573 6061.53,3819.53 6061.53,3920 6040,3941.53 5878.47,3941.53 P3.5@5820,4000 ; 7103,3399.69 7110.87,3407.56 7103.6,3407.56 ; C22.2@7525,3622.44 C22.2@7529.21,3622.44 ; C29.2@7537.09,3542.44 7537.09,3614.57 C22.2@7529.21,3622.44 ; U7.28@7612.09,3652.28 7577.28,3652.28 7547.44,3622.44 C22.2@7529.21,3622.44 ; 1545.31,2821 1564.25,2802.06 1564.25,2748.24 1572.49,2740 1613,2740 1637.56,2764.56 v1@1637.56,3206.44 ; 4465.5,2427.22 4482.78,2444.5 4527.78,2444.5 4535.5,2452.22 ; 4465.5,2427.22 4465.5,2402.78 4492.78,2375.5 4492.78,2344.5 ; 4492.78,2344.5 4529.28,2344.5 4591.88,2281.9 4617.1,2281.9 4671.65,2227.35 4671.65,2143.1 4901.96,1912.79 4901.96,1866.04 ; 4535.5,2452.22 4535.5,2427.78 4552.78,2410.5 4631.98,2410.5 4638.81,2403.67 4676.45,2403.67 U5.32@4678.23,2401.89 4736,2401.89 4810.31,2476.2 C13.2@4810.31,2530 C14.2@4810.31,2610 4810.31,2646 4810.31,2648.13 4802.44,2656
  Top Layer w10: 894,4314 785,4205 785,3420 845,3360 P30.1@940,3360 ; P2.5@925,4175 P2.5@940,4175 ; P9.5@940,2109.06 P9.5@940,2120 ; P9.1@940,2309.06 P9.1@940,2320 ; P30.5@940,3149.06 P30.5@940,3160 ; P2.5@940,4155 P2.5@940,4160 ; C24.2@1537.44,2995 C23.2@1537.44,2935 1537.44,2890.87 1545.31,2883 C25.2@1545.31,2840 ; C3.2@1567.64,2042.24 C2.2@1567.64,1982.24 1567.64,1939.43 1593.07,1914 C4.2@1593.07,1872.24 ; C62.2@1637.56,3405 C61.2@1637.56,3465 ; 1637.56,3501 1639.69,3503.13 1639.69,3530.06 C63.2@1639.69,3540 ; 1637.56,3527.93 C63.2@1639.69,3540 ; C63.2@1649.63,3540 C63.2@1639.69,3540 ; C6.2@2075,1532.44 2097.44,1532.44 ; 2110.16,3494.64 2140,3464.8 C66.2@2140,3459.69 ; C5.2@2135,1532.44 2171,1532.44 2178.87,1540.31 C7.2@2215,1540.31 ; P5.1@2140,4100 P5.1@2140,4120 ; C65.2@2220,3455.12 C64.2@2280,3455.12 ; P32.13@2880,4049.06 P32.13@2880,4060 ; U8.28@3090.16,3597.56 3090.16,3559.84 3100,3550 C28.2@3100,3514.69 ; C26.2@3180,3522.56 C27.2@3240,3522.56 ; C11.2@3312.76,1517.44 C10.2@3372.76,1517.44 3408.76,1517.44 3416.63,1525.31 ; 3664.53,2447.5 R8.2@3664.53,2471 ; R8.2@3664.53,2475 R7.2@3664.53,2535 R6.2@3664.53,2595 ; R6.2@3664.53,2599 R5.2@3664.53,2655 ; 4337.69,3454.69 4338,3455 4350,3455 C71.2@4350,3454.69 4386,3454.69 4393.87,3462.56 C69.2@4430,3462.56 C70.2@4490,3462.56 ; C9.2@4652.24,1517.24 C8.2@4712.24,1517.24 ; C1.2@4802.24,1527.56 4802.24,1512.2 4829.4,1485.04 4829.4,1480.6 4832.09,1477.91 ; 4802.44,2656 4802.44,2653.87 4810.31,2646 ; R27.2@5360,2969.53 R30.2@5420,2969.53 R35.2@5480,2969.53 R37.2@5540,2969.53 R21.2@5600,2969.53 R23.2@5660,2969.53 R25.2@5720,2969.53 ; R33.2@5365,2164.53 R29.2@5425,2164.53 R26.2@5485,2164.53 R24.2@5545,2164.53 R22.2@5605,2164.53 R36.2@5665,2164.53 R32.2@5725,2164.53 R31.2@5785,2164.53 5785,2259 5795,2269 U14.24@5795,2364.96 ; 5635,3465 5635.16,3464.84 ; 5635.16,3465.16 U9.28@5635.16,3527.56 ; C33.2@5645,3424.69 5681,3424.69 5688.87,3432.56 C32.2@5725,3432.56 C31.2@5785,3432.56 ; 5746,2969.53 R28.2@5780,2969.53 ; C30.2@7537.09,3482.44 C29.2@7537.09,3542.44 ; P7.13@7640,920 P7.13@7650,920
  Top Layer w15: P9.13@940,1720 992.47,1772.47 992.47,1867.53 P9.9@940,1920 992.47,1972.47 992.47,2056.58 P9.5@940,2109.06 ; P9.5@940,2120 992.47,2172.47 992.47,2256.58 P9.1@940,2309.06 ; P30.5@940,3149.06 987.53,3101.53 987.53,3007.53 P30.9@940,2960 990,2910 990,2810 P30.13@950.94,2770.94 ; P30.1@940,3360 986,3314 986,3206 ; P30.5@950.94,3170.94 984.53,3204.53 ; U14.24@5795,2364.96 5795,2510 5847,2562 5893,2562 5930,2525 5930,2175 5885,2130 5885,1035 P4.1@6000,920 ; U18.28@7055.16,3502.56 7055.16,3456 7065,3446.16 C60.2@7065,3399.69 7103,3399.69 ; 7110.87,3407.56 C68.2@7150,3407.56 C67.2@7210,3407.56 7280,3407.56 ; 7537.09,3442.09 C30.2@7537.09,3482.44 ; P6.1@8060,3520 8140,3440 8140,3080 P13.13@8080,3020 8030,2970 8030,2870 P13.9@8080,2820 8030,2770 8030,2670 P13.5@8080,2620 8135,2565 8135,2475 P13.1@8080,2420
  Top Layer w20: P30.13@940,2770.94 P30.13@950.94,2770.94 ; P30.5@940,3170.94 P30.5@950.94,3170.94 ; P30.1@940,3360 825,3475 825,4045 P2.5@940,4160 ; 3522,4018 3968,3572 3968,3081.53 4000,3049.53 R12.2@4140,3049.53 ; v1(4185,1335) 4185,1681.5 4391.5,1888 ; 4391.5,1677 4391.5,1888 ; L1.2@4391.5,2040 4391.5,1888 ; 7282.37,3405 7295.63,3405 ; 7298.19,3407.56 7400,3407.56 ; v1@7400,3570 7400,3407.56 ; v1(7405,3740) 7560,3895 7560,3960 P11.1@7500,4020 ; 7537.09,3442.09 7502.56,3407.56 7400,3407.56
  Top Layer w40: P1.2@7080,2280 7080,3125 7280,3325 7280,3407.56
  Bottom Layer w8: P9.5@940,2120 990,2170 1550,2170 v1(1595,2125) ; P30.5@940,3160 986,3206 v1(1638,3206) v1(1943,3206) ; P2.9@940,3960 984.53,4004.53 984.53,4115.47 P2.5@940,4160 ; v1(1726,1697.14) 1859.86,1697.14 2048.5,1508.5 2048.5,1501.5 v1(2070,1480) ; 2250,4210 2255,4210 ; P31.1@3120,915 P31.1@3120,920 ; P31.5@3315,920 P31.5@3320,920 ; v1(4150,2685) 4205,2740 v1(4280,2740) ; 4542.53,4062.53 4555,4075 ; 4645,4075 4657.47,4062.53 ; v1(7400,3580) v1@7405,3585 ; P6.5@8060,3720 8090,3720 ; P6.9@8060,3920 P6.9@8085,3920
  Bottom Layer w15: P12.1@1880,920 1930,970 2030,970 P12.5@2080,920 ; P4.1@6000,920 6060,860 6140,860 P4.5@6200,920 6260,860 6340,860 P4.9@6400,920 6460,860 6540,860 P4.13@6600,920 6655,865 6985,865 P7.1@7040,920 7095,865 7185,865 P7.5@7240,920 7300,860 7380,860 P7.9@7440,920 7505,855 7575,855 P7.13@7640,920 7700,860 7945,860 8040,955 P10.1@8040,1380 8100,1440 8100,1520 P10.5@8040,1580 8095,1635 8095,1725 P10.9@8040,1780 8095,1835 8095,1925 P10.13@8040,1980 8125,2065 8125,2375 P13.1@8080,2420 ; P11.1@7500,4020 7645,4165 8015,4165 P6.13@8060,4120 8115,4065 8115,3975 P6.9@8060,3920 ; P6.1@8060,3520 8115,3575 8115,3665 P6.5@8060,3720 ; P6.9@8085,3920 8145,3860 8145,3775 8090,3720
  Bottom Layer w20: P9.1@940,2320 822,2202 670,2202 632,2240 632,2452 P30.13@940,2760 ; P2.5@940,4160 990,4210 1650,4210 ; P5.13@1540,4100 1650,4210 ; P5.9@1740,4100 1850,4210 ; P5.5@1940,4100 2040,4200 ; P12.5@2080,920 2140,860 2220,860 P12.9@2280,920 2345,855 2415,855 P12.13@2480,920 2545,855 3055,855 P31.1@3120,920 ; P5.1@2140,4100 2250,4210 ; P31.1@3120,915 3180,855 3250,855 P31.5@3315,920 ; P31.5@3320,920 3380,860 3460,860 P31.9@3520,920 3580,860 3660,860 P31.13@3720,920 3780,860 4420,860 P33.1@4480,920 4540,860 4620,860 P33.5@4680,920 4740,860 4820,860 P33.9@4880,920 4940,860 5020,860 P33.13@5080,920 ; v1(4185,1335) 4185,920 4245,860 ; 4542.53,4062.53 P8.5@4500,4020 4455,4065 4345,4065 P8.9@4300,4020 4255,4065 4145,4065 P8.13@4100,4020 4051,4069 3471,4069 3425,4115 3335,4115 P32.5@3280,4060 3225,4115 3135,4115 P32.9@3080,4060 3025,4115 2935,4115 P32.13@2880,4060 2730,4210 1850,4210 ; 4555,4075 4645,4075 ; 4657.47,4062.53 P8.1@4700,4020 4750,4070 5350,4070 P3.13@5420,4000 5484.53,4064.53 5555.47,4064.53 P3.9@5620,4000 5680,4060 5760,4060 P3.5@5820,4000 5885,4065 5955,4065 P3.1@6020,4000 6089,4069 6851,4069 P11.13@6900,4020 6965,4085 7035,4085 P11.9@7100,4020 7175,4095 7225,4095 P11.5@7300,4020 7370,4090 7430,4090 P11.1@7500,4020 ; v1@7405,3585 v1(7405,3740) ; 1650,4210 1850,4210
VDD25: C20.2 C21.2 U5.7 U5.14 U5.38 U5.62 U5.88 | length 1999.7
  Top Layer w8: v1(3975,2535) 3988.19,2535 4003.19,2520 U5.88@4081.77,2520 ; C20.2@4212.44,2100 4212.44,2128 4261.89,2177.45 U5.7@4261.89,2221.77 4261.89,2280.26 v1@4328.63,2347 ; v1(4315,2539) 4348,2506 4348,2421.45 ; v1(4324,2347) 4348,2371 4348,2421.45 ; U5.14@4399.69,2221.77 4399.69,2304.69 v1(4420,2325) ; U5.62@4399.69,2818.23 4399.69,2538.31 ; U5.38@4678.23,2520 4418,2520 4399.69,2538.31 ; 4348,2421.45 4399.69,2473.14 4399.69,2538.31
  Top Layer w10: C20.2@4212.44,2100 4212.44,2063.87 4220.31,2056 C21.2@4220.31,2020
  Bottom Layer w8: v1(3975,2535) 3988.19,2535 4017.28,2505.91 4240,2505.91 4273.09,2539 v1(4315,2539) ; v1(4324,2347) 4398,2347 v1(4420,2325) v1@4424.19,2320.81
VDDA: C19.2 L1.1 U5.3 U5.98 | length 932.1
  Top Layer w8: U5.98@4081.77,2323.15 4121,2323.15 4183.15,2261 U5.3@4183.15,2221.77 4183.15,2184 4138,2138.85 4138,2037 4116,2015 v1(4100,2015) ; C19.2@4160,2080.31 4160,1988.84 4199.34,1949.5 v1(4225.5,1949.5) 4294.01,1949.5 4328.5,1984 L1.1@4328.5,2040
  Bottom Layer w8: v1(4100,2015) 4116,2015 4108,2007 4165.5,1949.5 v1(4225.5,1949.5)
pads on no net: C34.1 C34.2 C35.1 C35.2 C36.1 C36.2 C37.1 C37.2 C38.1 C38.2 C39.1 C39.2 C40.1 C40.2 C41.1 C41.2 C42.1 C42.2 C43.1 C43.2 C44.1 C44.2 C45.1 C45.2 D3.2 J1.7 P1.1 R17.1 R17.2 R18.1 R18.2 R19.1 R19.2 R20.1 R20.2 SW1.2 SW1.3 U1.2 U1.3 U1.4 U1.21 U1.22 U1.24 U1.25 U2.2 U2.3 U2.4 U2.21 U2.22 U2.24 U2.25 U3.2 U3.3 U3.4 U3.21 U3.22 U3.24 U3.25 U4.2 U4.3 U4.4 U4.21 U4.22 U4.24 U4.25 U5.1 U5.2 U5.5 U5.11 U5.13 U5.16 U5.17 U5.18 U5.35 U5.37 U5.40 U5.43 U5.46 U5.51 U5.52 U5.53 U5.55 U5.67 U5.71 U5.91 U6.2 U6.3 U6.4 U6.21 U6.22 U6.24 U6.25 U7.2 U7.3 U7.4 U7.9 U7.11 U7.12 U7.13 U7.14 U7.21 U7.22 U7.24 U7.25 U8.2 U8.3 U8.4 U8.21 U8.22 U8.24 U8.25 U9.2 U9.3 U9.4 U9.21 U9.22 U9.24 U9.25 U10.1 U10.2 U10.3 U10.4 U10.5 U10.10 U10.15 U10.20 U10.21 U10.22 U10.23 U10.24 U10.25 U10.26 U10.27 U10.28 U10.29 U10.30 U10.32 U10.33 U11.1 U11.2 U11.3 U11.4 U11.5 U11.9 U11.10 U11.11 U11.12 U11.13 U11.14 U11.15 U11.20 U11.21 U11.22 U11.23 U11.24 U11.25 U11.26 U11.27 U11.28 U11.29 U11.30 U11.32 U11.33 U12.1 U12.2 U12.3 U12.4 U12.5 U12.10 U12.15 U12.20 U12.21 U12.22 U12.23 U12.24 U12.25 U12.26 U12.27 U12.28 U12.29 U12.30 U12.32 U12.33 U13.1 U13.2 U13.3 U13.4 U13.5 U13.10 U13.15 U13.20 U13.21 U13.22 U13.23 U13.24 U13.25 U13.26 U13.27 U13.28 U13.29 U13.30 U13.32 U13.33 U15.1 U15.2 U15.3 U15.6 U15.8 U15.9 U15.10 U15.12 U15.13 U15.14 U15.24 U15.27 U15.28 U16.27 U17.2 U17.3 U17.4 U17.21 U17.22 U17.24 U17.25 U18.2 U18.3 U18.4 U18.21 U18.22 U18.24 U18.25 U19.2 U19.3 U19.4 U19.21 U19.22 U19.24 U19.25 U20.2 U20.3 U20.4 U20.21 U20.22 U20.24 U20.25
copper on no net:
  other v1: 7117.76,1307.76 7165,1307.76 7212.24,1307.76 7117.76,1355 7165,1355 7212.24,1355 6052.76,1392.76 6100,1392.76 6147.24,1392.76 7117.76,1402.24 7165,1402.24 7212.24,1402.24 6052.76,1440 6100,1440 6147.24,1440 6052.76,1487.24 6100,1487.24 6147.24,1487.24 7492.76,1892.76 7540,1892.76 7587.24,1892.76 7492.76,1940 7540,1940 7587.24,1940 7492.76,1987.24 7540,1987.24 7587.24,1987.24 7572.76,2687.76 7620,2687.76 7667.24,2687.76 7572.76,2735 7620,2735 7667.24,2735 7572.76,2782.24 7620,2782.24 7667.24,2782.24

## Other copper
Multi-Layer:
  the board outline again, w10

## Text inside footprints (layer, text, board x,y; h text height)
P2: Top Overlay "2" at 1020,4460 h50 r270; Top Overlay "1" at 920,4460 h50 r270; Top Overlay "15" at 920,3600 h50 r270; Top Overlay "16" at 1020,3600 h50 r270
P3: Top Overlay "2" at 6120,3920 h50 r180; Top Overlay "1" at 6120,4020 h50 r180; Top Overlay "15" at 5260,4020 h50 r180; Top Overlay "16" at 5260,3920 h50 r180
P4: Top Overlay "2" at 5900,1000 h50; Top Overlay "1" at 5900,900 h50; Top Overlay "15" at 6760,900 h50; Top Overlay "16" at 6760,1000 h50
P5: Top Overlay "2" at 2240,4020 h50 r180; Top Overlay "1" at 2240,4120 h50 r180; Top Overlay "15" at 1380,4120 h50 r180; Top Overlay "16" at 1380,4020 h50 r180
P6: Top Overlay "2" at 7980,3420 h50 r90; Top Overlay "1" at 8080,3420 h50 r90; Top Overlay "15" at 8080,4280 h50 r90; Top Overlay "16" at 7980,4280 h50 r90
P7: Top Overlay "2" at 6940,1000 h50; Top Overlay "1" at 6940,900 h50; Top Overlay "15" at 7800,900 h50; Top Overlay "16" at 7800,1000 h50
P8: Top Overlay "2" at 4800,3940 h50 r180; Top Overlay "1" at 4800,4040 h50 r180; Top Overlay "15" at 3940,4040 h50 r180; Top Overlay "16" at 3940,3940 h50 r180
P9: Top Overlay "2" at 1020,2420 h50 r270; Top Overlay "1" at 920,2420 h50 r270; Top Overlay "15" at 920,1560 h50 r270; Top Overlay "16" at 1020,1560 h50 r270
P10: Top Overlay "2" at 7960,1280 h50 r90; Top Overlay "1" at 8060,1280 h50 r90; Top Overlay "15" at 8060,2140 h50 r90; Top Overlay "16" at 7960,2140 h50 r90
P11: Top Overlay "2" at 7600,3940 h50 r180; Top Overlay "1" at 7600,4040 h50 r180; Top Overlay "15" at 6740,4040 h50 r180; Top Overlay "16" at 6740,3940 h50 r180
P12: Top Overlay "2" at 1780,1000 h50; Top Overlay "1" at 1780,900 h50; Top Overlay "15" at 2640,900 h50; Top Overlay "16" at 2640,1000 h50
P13: Top Overlay "2" at 8000,2320 h50 r90; Top Overlay "1" at 8100,2320 h50 r90; Top Overlay "15" at 8100,3180 h50 r90; Top Overlay "16" at 8000,3180 h50 r90
P14: Top Overlay "6" at 700,3240 h50 r270; Top Overlay "10" at 700,2680 h50 r270; Top Overlay "5" at 600,2680 h50 r270; Top Overlay "1" at 600,3240 h50 r270
P15: Top Overlay "6" at 4540,700 h50; Top Overlay "10" at 5100,700 h50; Top Overlay "5" at 5100,600 h50; Top Overlay "1" at 4540,600 h50
P16: Top Overlay "6" at 3400,4340 h50 r180; Top Overlay "10" at 2840,4340 h50 r180; Top Overlay "5" at 2840,4440 h50 r180; Top Overlay "1" at 3400,4440 h50 r180
P17: Top Overlay "6" at 6040,700 h50; Top Overlay "10" at 6600,700 h50; Top Overlay "5" at 6600,600 h50; Top Overlay "1" at 6040,600 h50
P18: Top Overlay "6" at 5935,4340 h50 r180; Top Overlay "10" at 5375,4340 h50 r180; Top Overlay "5" at 5375,4440 h50 r180; Top Overlay "1" at 5935,4440 h50 r180
P19: Top Overlay "6" at 7120,700 h50; Top Overlay "10" at 7680,700 h50; Top Overlay "5" at 7680,600 h50; Top Overlay "1" at 7120,600 h50
P20: Top Overlay "6" at 700,4280 h50 r270; Top Overlay "10" at 700,3720 h50 r270; Top Overlay "5" at 600,3720 h50 r270; Top Overlay "1" at 600,4280 h50 r270
P21: Top Overlay "6" at 8300,3580 h50 r90; Top Overlay "10" at 8300,4140 h50 r90; Top Overlay "5" at 8400,4140 h50 r90; Top Overlay "1" at 8400,3580 h50 r90
P22: Top Overlay "6" at 8300,1435 h50 r90; Top Overlay "10" at 8300,1995 h50 r90; Top Overlay "5" at 8400,1995 h50 r90; Top Overlay "1" at 8400,1435 h50 r90
P23: Top Overlay "6" at 700,2100 h50 r270; Top Overlay "10" at 700,1540 h50 r270; Top Overlay "5" at 600,1540 h50 r270; Top Overlay "1" at 600,2100 h50 r270
P24: Top Overlay "6" at 2060,4340 h50 r180; Top Overlay "10" at 1500,4340 h50 r180; Top Overlay "5" at 1500,4440 h50 r180; Top Overlay "1" at 2060,4440 h50 r180
P25: Top Overlay "6" at 1920,700 h50; Top Overlay "10" at 2480,700 h50; Top Overlay "5" at 2480,600 h50; Top Overlay "1" at 1920,600 h50
P26: Top Overlay "6" at 8300,2500 h50 r90; Top Overlay "10" at 8305,3045 h50 r90; Top Overlay "5" at 8400,3060 h50 r90; Top Overlay "1" at 8400,2500 h50 r90
P27: Top Overlay "6" at 4620,4340 h50 r180; Top Overlay "10" at 4060,4340 h50 r180; Top Overlay "5" at 4060,4440 h50 r180; Top Overlay "1" at 4620,4440 h50 r180
P28: Top Overlay "6" at 3180,700 h50; Top Overlay "10" at 3740,700 h50; Top Overlay "5" at 3740,600 h50; Top Overlay "1" at 3180,600 h50
P29: Top Overlay "6" at 7405,4340 h50 r180; Top Overlay "10" at 6845,4340 h50 r180; Top Overlay "5" at 6845,4440 h50 r180; Top Overlay "1" at 7405,4440 h50 r180
P30: Top Overlay "2" at 1020,3460 h50 r270; Top Overlay "1" at 920,3460 h50 r270; Top Overlay "15" at 920,2600 h50 r270; Top Overlay "16" at 1020,2600 h50 r270
P31: Top Overlay "2" at 3020,1000 h50; Top Overlay "1" at 3020,900 h50; Top Overlay "15" at 3880,900 h50; Top Overlay "16" at 3880,1000 h50
P32: Top Overlay "2" at 3580,3980 h50 r180; Top Overlay "1" at 3580,4080 h50 r180; Top Overlay "15" at 2720,4080 h50 r180; Top Overlay "16" at 2720,3980 h50 r180
P33: Top Overlay "2" at 4380,1000 h50; Top Overlay "1" at 4380,900 h50; Top Overlay "16" at 5240,1000 h50